# Altium PCB PCB1without_res.PcbDoc
Units mil, origin at the board's own origin, x right, y up, seen from the top; angles counter-clockwise.
Board outline 1470 x 1725 mil, 2 copper layers (Top Layer, Bottom Layer); 3 components, 22 nets, 44 pads, 0 vias.
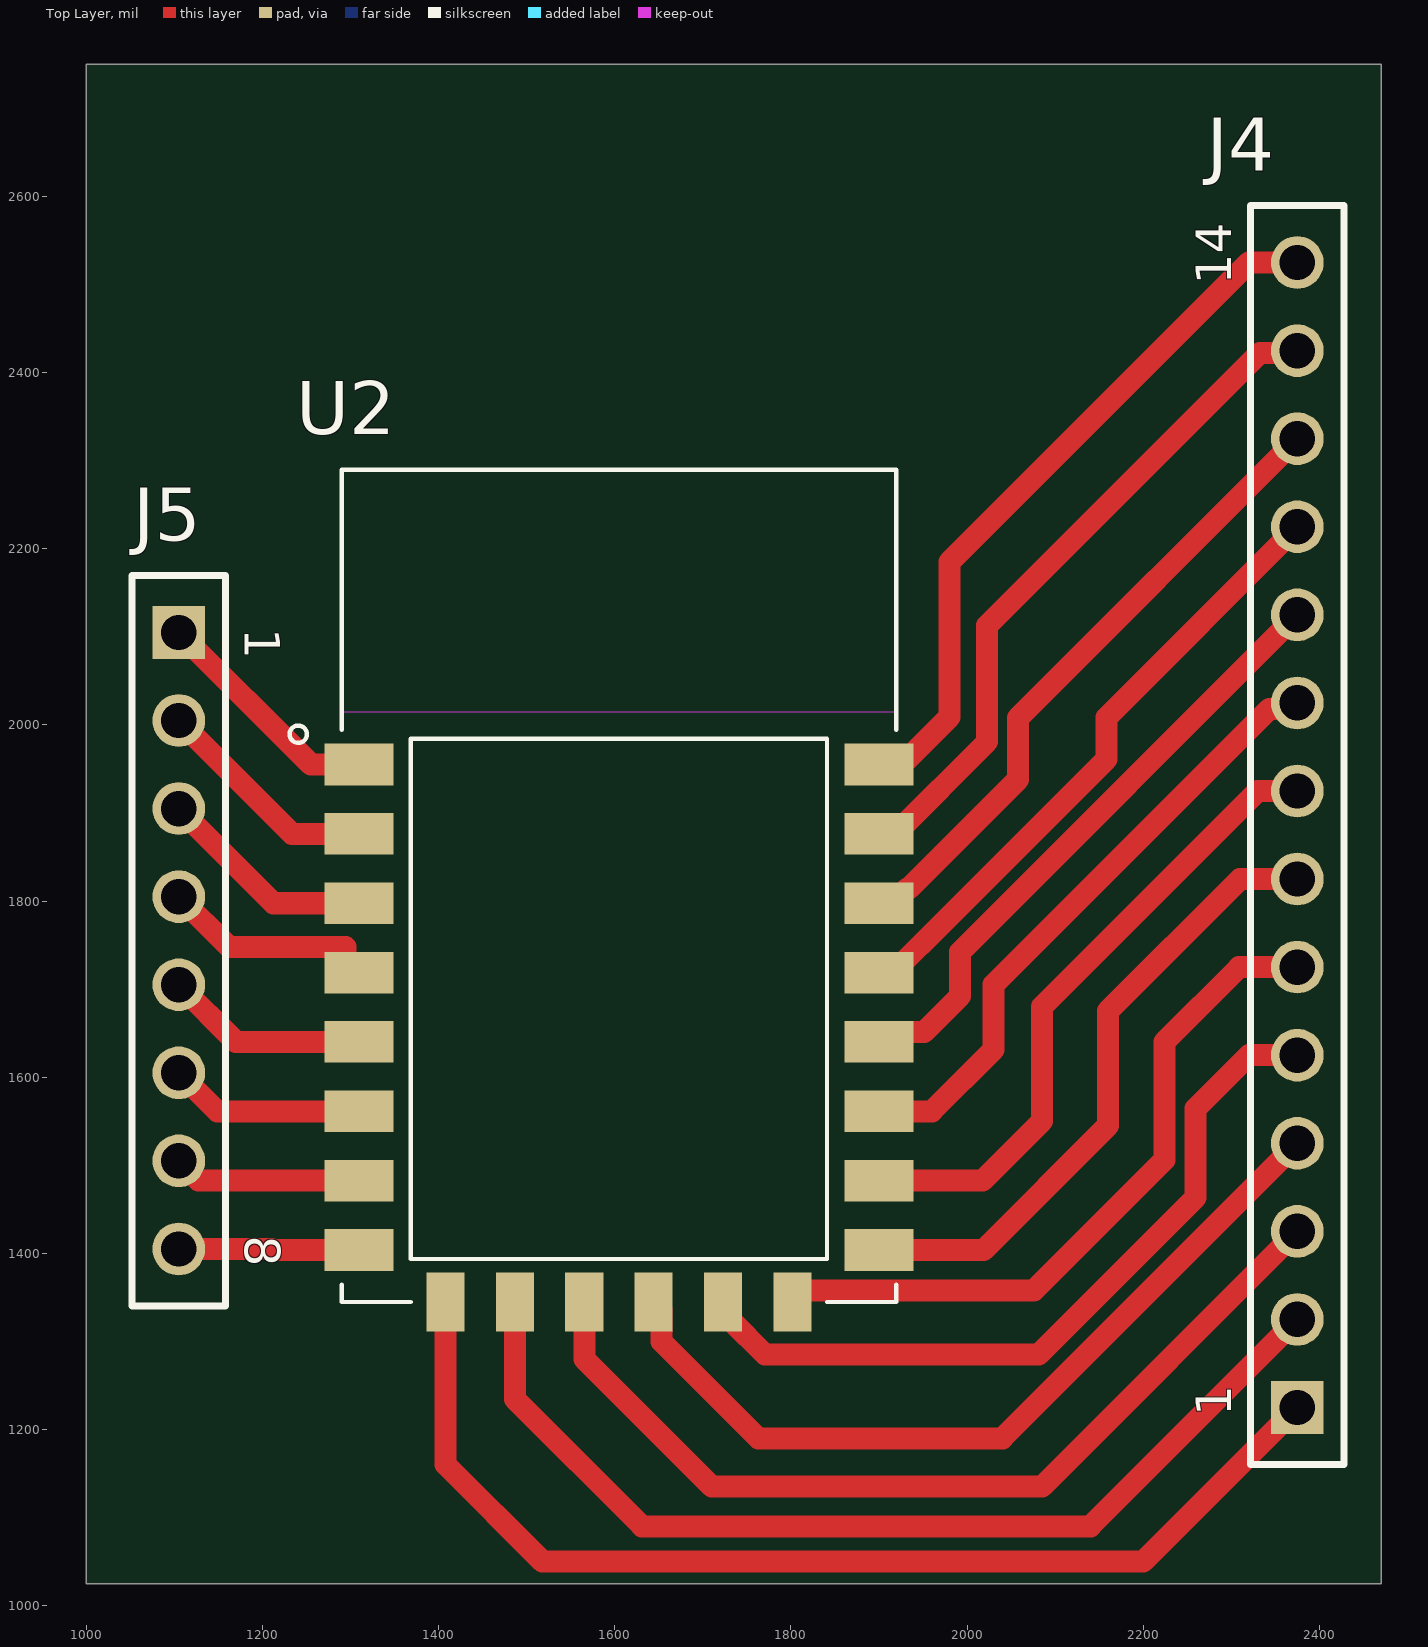
[diagram p0: Top Layer view]
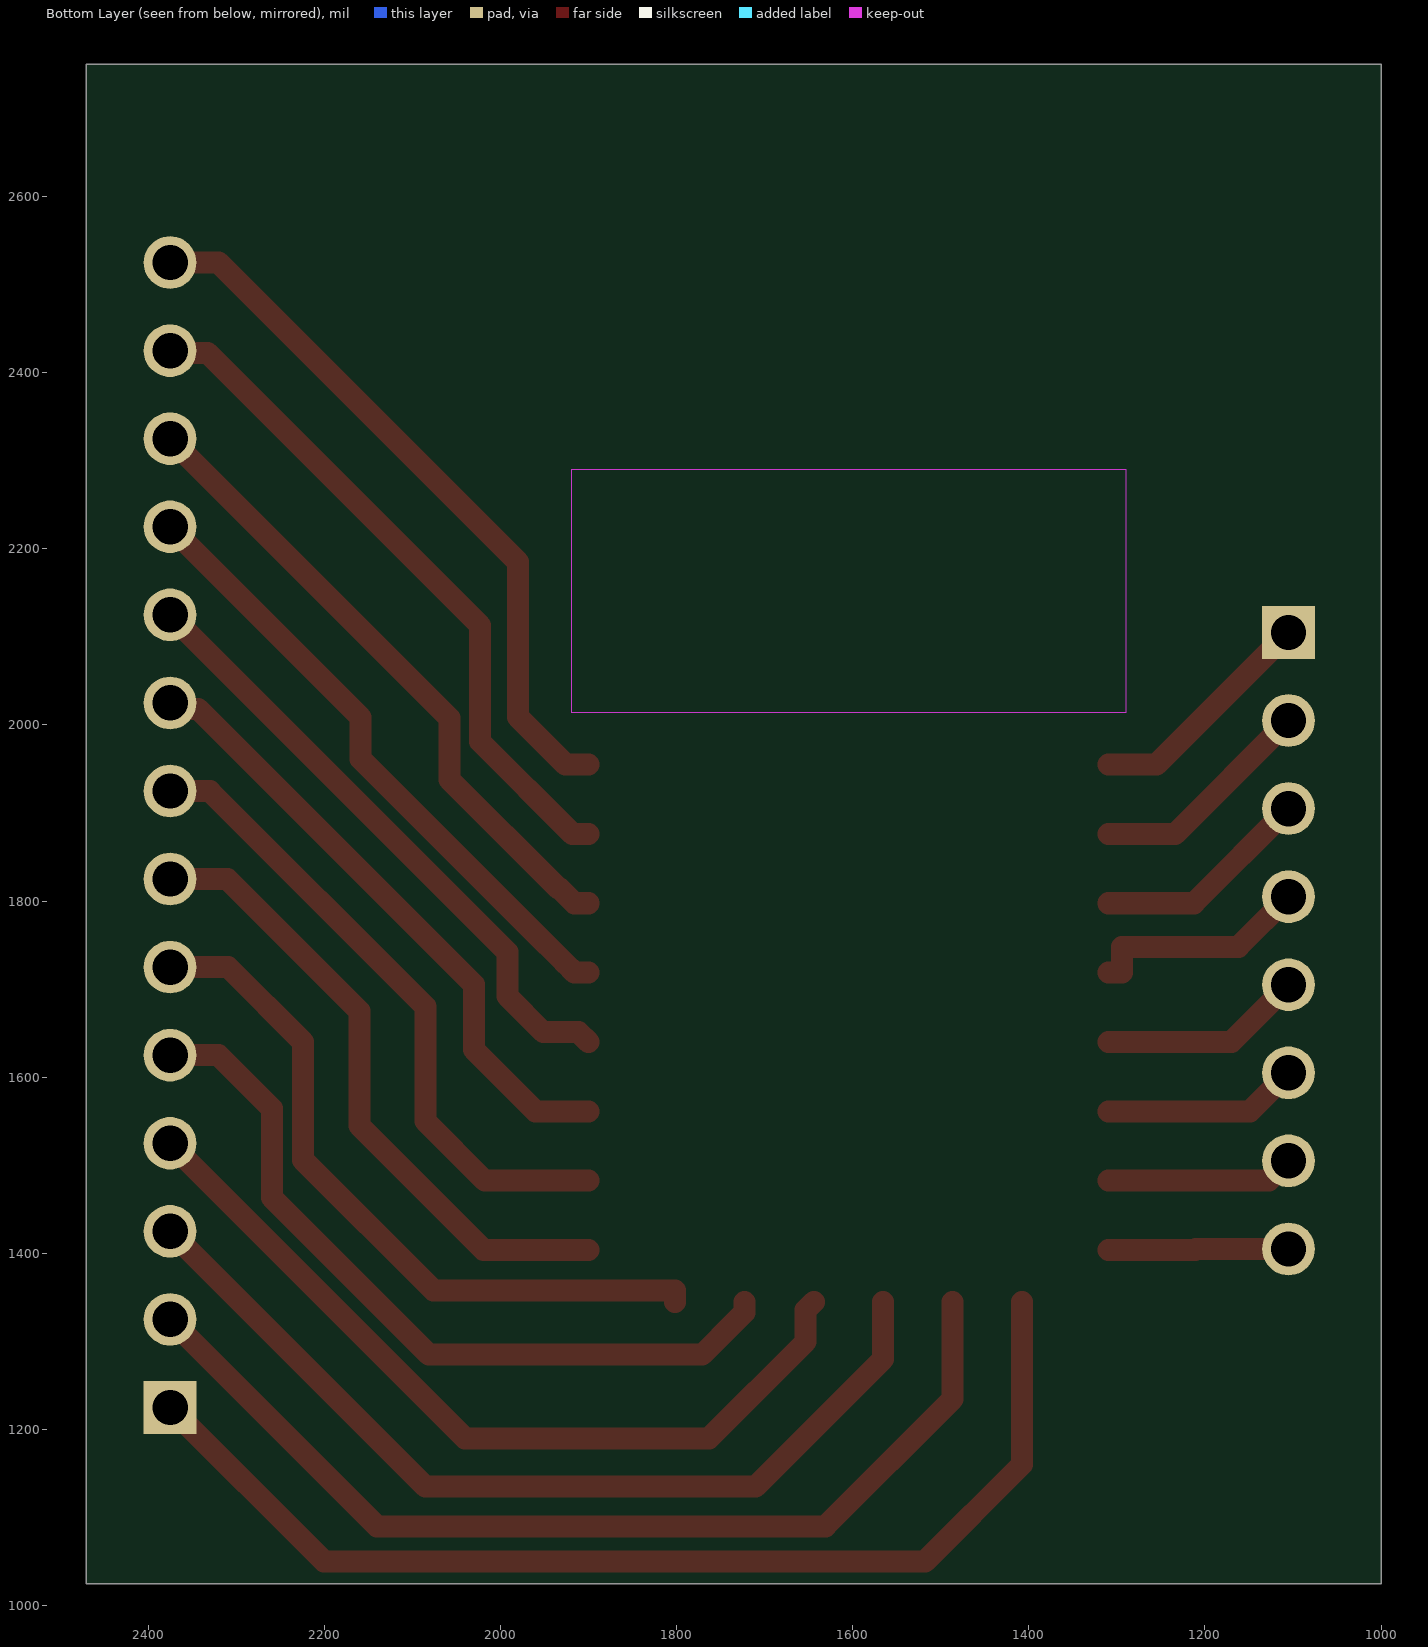
[diagram p1: Bottom Layer view, seen from below]

## Layer stack, top to bottom
Top Solder: solder mask 0.4, Solder Resist, Dk 3.5
Top Layer: signal copper 1.4
Dielectric 1: dielectric 12.6, FR-4, Dk 4.8
Bottom Layer: signal copper 1.4
Bottom Solder: solder mask 0.4, Solder Resist, Dk 3.5

## Board outline
1000,1025 2470,1025 2470,2750 1000,2750

## Design rules (kind name [scope] priority, off if disabled: settings)
Clearance [All] p1: gap=10 ignorepadtopadclearanceinfootprint=FALSE except(0: Arc-Hole Track-Hole SMDPad-Hole THPad-Hole Via-Hole Fill-Hole Poly-Hole Region-Hole Text-Hole)
PolygonConnect [All] p1: connectstyle=Relief reliefconductorwidth=10 reliefentries=4 polygonreliefangle="90 Angle" airgapwidth=10
RoutingVias [All] p1: holewidth=28 width=50 viastyle="Through Hole" minholewidth=28 minwidth=50 maxholewidth=28 maxwidth=50
SolderMaskExpansion [All] p1: expansion=4 istentingtop=FALSE
Width [All] p1: maxlimit=25 minlimit=10 preferedwidth=25 minimp=50.000000 maximp=50.000000 favimp=50.000000
30 further rules are at their usual default settings.

## Classes and differential pairs
component class Sheet1without_res: J5 U2

## Components (designator, comment, footprint, x,y, rotation, side; value= is the part's Value field where it differs from the comment)
J4 "61301411821" 61301411821 2375,1875 r90 top
J5 "61300811821" 61300811821 1105,1755 r270 top
U2 "ESP8266-12E/ESP-12E" XCVR_ESP8266-12E/ESP-12E 1604.72,1679.41 r0 top

## Footprints (in the part's own frame and the unit in brackets; to place one, negate y for a bottom-side part, rotate by r counter-clockwise, add the part's x,y. Pads: shape width x height; smd on the part's side, far side on the other; paste and mask are expansions set on the pad)
61300811821 [mm] "Socket Header, Pitch 2.54 mm, THT, Vertical, single row, 8p"
  rect 1.52x1.52 hole 1.02: 1(-8.89,0)
  round 1.52 hole 1.02: 2(-6.35,0) 3(-3.81,0) 4(-1.27,0) 5(1.27,0) 6(3.81,0) 7(6.35,0) 8(8.89,0)
  silkscreen extent -10.54,-1.35 10.54,1.35, body extent -10.41,-1.25 10.41,1.25, height 8.55
61301411821 [mm] "Socket Header, Pitch 2.54 mm, THT, Vertical, single row, 14p"
  rect 1.52x1.52 hole 1.02: 1(-16.51,0)
  round 1.52 hole 1.02: 2(-13.97,0) 3(-11.43,0) 4(-8.89,0) 5(-6.35,0) 6(-3.81,0) 7(-1.27,0) 8(1.27,0) 9(3.81,0) 10(6.35,0) 11(8.89,0) 12(11.43,0) 13(13.97,0) 14(16.51,0)
  silkscreen extent -18.16,-1.35 18.16,1.35, body extent -18.03,-1.25 18.03,1.25, height 8.55
XCVR_ESP8266-12E/ESP-12E [mm]
  rect 2x1.2 smd: 1(-7.5,7) 2(-7.5,5) 3(-7.5,3) 4(-7.5,1) 5(-7.5,-1) 6(-7.5,-3) 7(-7.5,-5) 8(-7.5,-7) 15(7.5,-7) 16(7.5,-5) 17(7.5,-3) 18(7.5,-1) 19(7.5,1) 20(7.5,3) 21(7.5,5) 22(7.5,7)
  rect 1.1x1.7 smd: 9(-5,-8.5) 10(-3,-8.5) 11(-1,-8.5) 12(1,-8.5) 13(3,-8.5) 14(5,-8.5)
  Keep-Out Layer region: 8,8.51 -8.009,8.51 -8.009,15.5 8,15.5
  Keep-Out Layer region: 8,8.51 -8.009,8.51 -8.009,15.5 8,15.5
  silkscreen extent -9.5,-8.5 8,15.5

## Part data
J4: "WR-PHD Socket Header, THT, pitch 2.54mm, Single Row, Vertical, 14p", Contact Resistance=20mOhm, Manufacturer="Wurth Elektronik", Operating Temperature="-40 to +125degC", Rated Current=3A, Withstanding Voltage=500VAC, Working Voltage=250VAC, ComponentLink1Description=Manufacturer, ComponentLink1URL=http://www.we-online.de, ComponentLink2Description=Datasheet, ComponentLink2URL=https://www.we-online.com/catalog/datasheet/61301411821.pdf, Gender="Socket Header", Manufacturer Part Number=61301411821, Mounting Technology=THT, Orientation=Vertical, Packaging=Tray, Pin Number=14, Pitch=2.54mm, Published Date="May 2020", Row Number=Single
J5: "WR-PHD Socket Header, THT, pitch 2.54mm, Single Row, Vertical, 8p", Contact Resistance=20mOhm, Manufacturer="Wurth Elektronik", Operating Temperature="-40 to +125degC", Rated Current=3A, Withstanding Voltage=500VAC, Working Voltage=250VAC, ComponentLink1Description=Manufacturer, ComponentLink1URL=http://www.we-online.de, ComponentLink2Description=Datasheet, ComponentLink2URL=https://www.we-online.com/catalog/datasheet/61300811821.pdf, Gender="Socket Header", Manufacturer Part Number=61300811821, Mounting Technology=THT, Orientation=Vertical, Packaging=Tray, Pin Number=8, Pitch=2.54mm, Published Date="May 2020", Row Number=Single
U2: "This WiFi module has a 32-bit MCU micro and clock speeds supporting 80 MHz or 160 MHz. Supports the RTOS and integrated Wi-Fi MAC/BB/RF/PA/LNA, and has an on-board antenna.", Package=None, Availability=Unavailable, MF=AI-Thinker, MP=ESP8266-12E/ESP-12E, Price=None, SnapEDA_Link=https://www.snapeda.com/parts/ESP8266-12E/ESP-12E/AI-Thinker/view-part/106414/?ref=snap

## Nets (pads, with @x,y where several pads share a name; then routed paths per layer and width w, separated by ;. In a path a pad name is that pad's centre, name@x,y a point inside that pad or via, vN(x,y) a via of type N, cw(c..) or ccw(c..) an arc to the next point about the centre after c; other vN are vias at no path point)
ADC: J5.2 U2.2 | length 257.8
  Top Layer w25: J5.2 1233.74,1876.26 U2.2
CS0: J4.1 U2.9 | length 1269.9
  Top Layer w25: U2.9 1407.87,1160 1517.87,1050 2200,1050 J4.1
EN: J5.3 U2.3 | length 249
  Top Layer w25: J5.3 1212.48,1797.52 U2.3
GND: J4.7 U2.15 | length 725.6
  Top Layer w25: U2.15 2018.82,1403.82 2160.07,1545.07 2160.07,1675.07 2310,1825 J4.7
IO0: J4.10 U2.18 | length 705.1
  Top Layer w25: U2.18 1911.12,1651.16 1951.12,1651.16 1991.98,1692.02 1991.98,1741.98 J4.10
IO2: J4.9 U2.17 | length 710.2
  Top Layer w25: U2.17 1960,1561.3 2030,1631.3 2030,1705 2343.33,2018.33 2368.33,2018.33 J4.9
IO4: J4.11 U2.19 | length 712.4
  Top Layer w25: U2.19 1915.75,1718.78 1926.87,1729.9 1948.37,1751.4 1948.69,1751.4 2158.51,1961.22 2158.51,2008.51 J4.11
IO5: J4.12 U2.20 | length 734.4
  Top Layer w25: U2.20 1915.75,1797.52 1932.44,1814.22 1934.05,1814.22 2057.84,1938.01 2057.84,2007.84 J4.12
IO9: J4.3 U2.11 | length 1054.6
  Top Layer w25: U2.11 1565.35,1280 1710.35,1135 2085,1135 J4.3
IO10: J4.4 U2.12 | length 954.8
  Top Layer w25: U2.12 1653.25,1335.61 1653.25,1299.73 1762.98,1190 2040,1190 J4.4
IO12: J5.6 U2.6 | length 222.5
  Top Layer w25: J5.6 1148.7,1561.3 U2.6
IO13: J5.7 U2.7 | length 213.7
  Top Layer w25: J5.7 1127.44,1482.56 U2.7
IO14: J5.5 U2.5 | length 231.4
  Top Layer w25: J5.5 1169.96,1640.04 U2.5
IO15: J4.8 U2.16 | length 734.4
  Top Layer w25: U2.16 2017.56,1482.56 2085,1550 2085,1680 2329.83,1924.83 2374.83,1924.83 J4.8
IO16: J5.4 U2.4 | length 257.3
  Top Layer w25: J5.4 1162,1748 1294,1748 1294,1718.78 U2.4
MISO: J4.2 U2.10 | length 1155.9
  Top Layer w25: U2.10 1486.61,1234.39 1631,1090 2140,1090 J4.2
MOSI: J4.5 U2.13 | length 883.8
  Top Layer w25: U2.13 1722.83,1332.95 1731.99,1323.8 1770.79,1285 2081,1285 2259.28,1463.28 2259.28,1564.28 2320,1625 J4.5
RESET: J5.1 U2.1 | length 266.6
  Top Layer w25: J5.1 1255,1955 U2.1
RXD: J4.13 U2.21 | length 779.5
  Top Layer w25: U2.21 1918.13,1876.26 2022.84,1980.97 2022.84,2112.84 2332.33,2422.33 2372.33,2422.33 J4.13
SCLK: J4.6 U2.14 | length 817
  Top Layer w25: U2.14 1801.57,1357.69 2075.69,1357.69 2224,1506 2224,1640 2309,1725 J4.6
TXD: J4.14 U2.22 | length 814.2
  Top Layer w25: U2.22 1926,1955 1980,2009 1980,2185 2320,2525 J4.14
VCC: J5.8 U2.8 | length 204.9
  Top Layer w25: J5.8 1210,1405 1211.18,1403.82 U2.8

## Text inside footprints (layer, text, board x,y; h text height)
J4: Top Overlay "14" at 2300,2500 h40 r90; Top Overlay "1" at 2300,1215 h40 r90
J5: Top Overlay "8" at 1180,1420 h40 r270; Top Overlay "1" at 1180,2110 h40 r270